# EAGLE board sw63_mk3_jig (EAGLE 9.6.2)
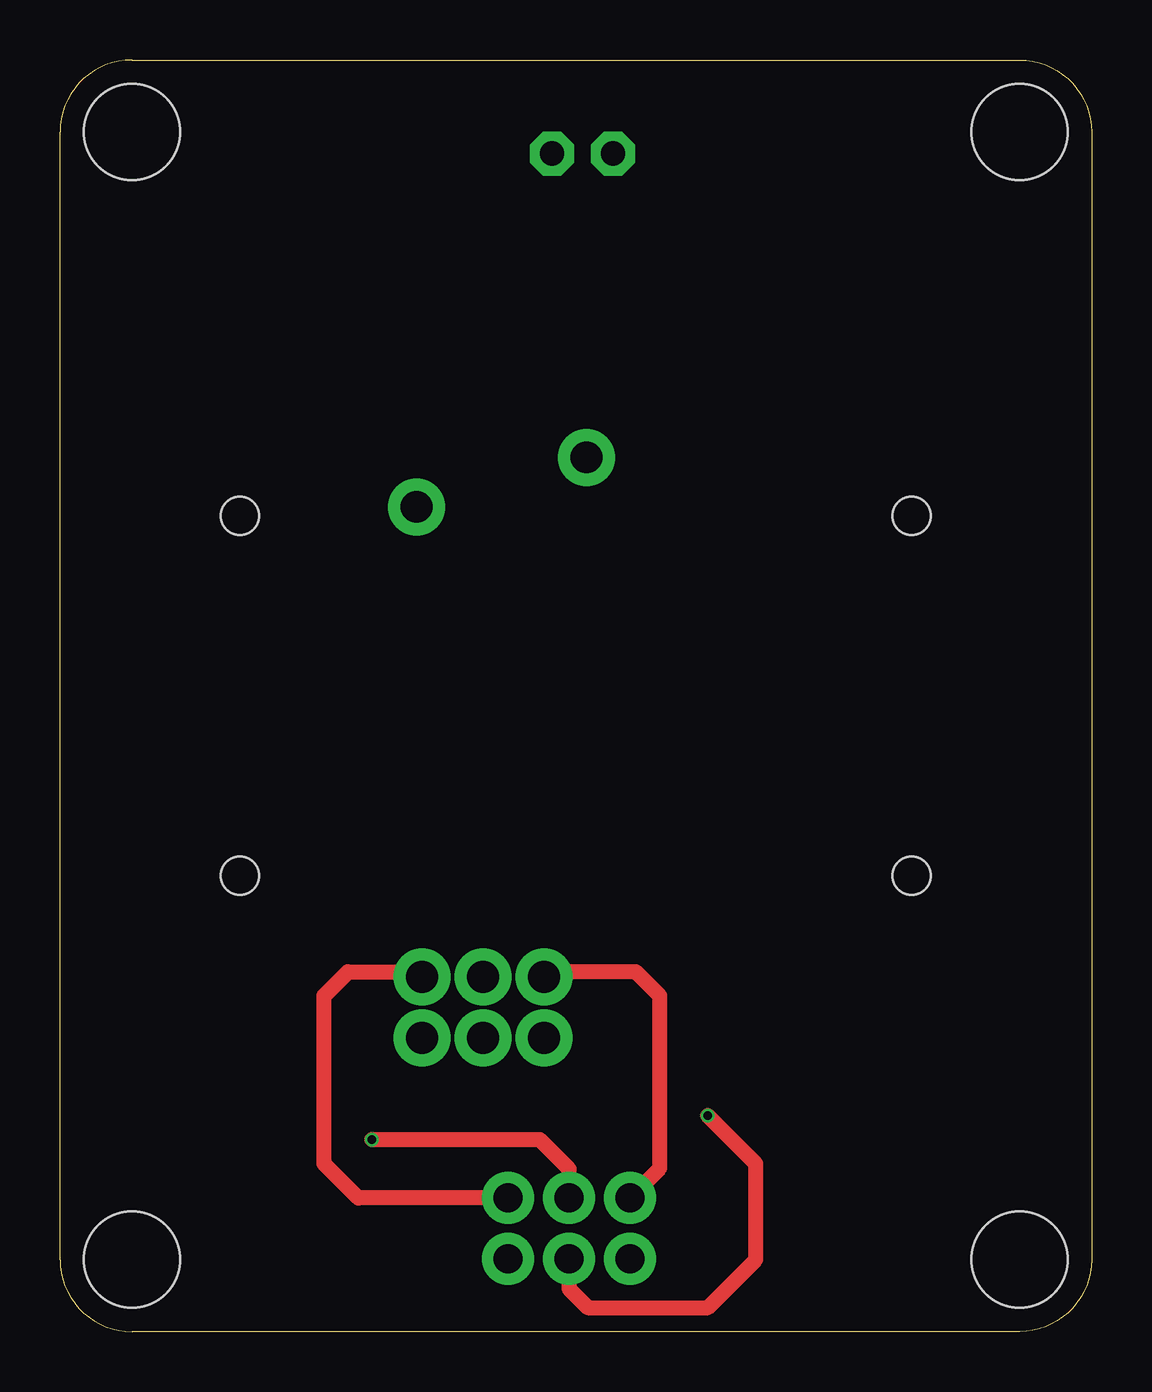
[diagram p0: board, top side]
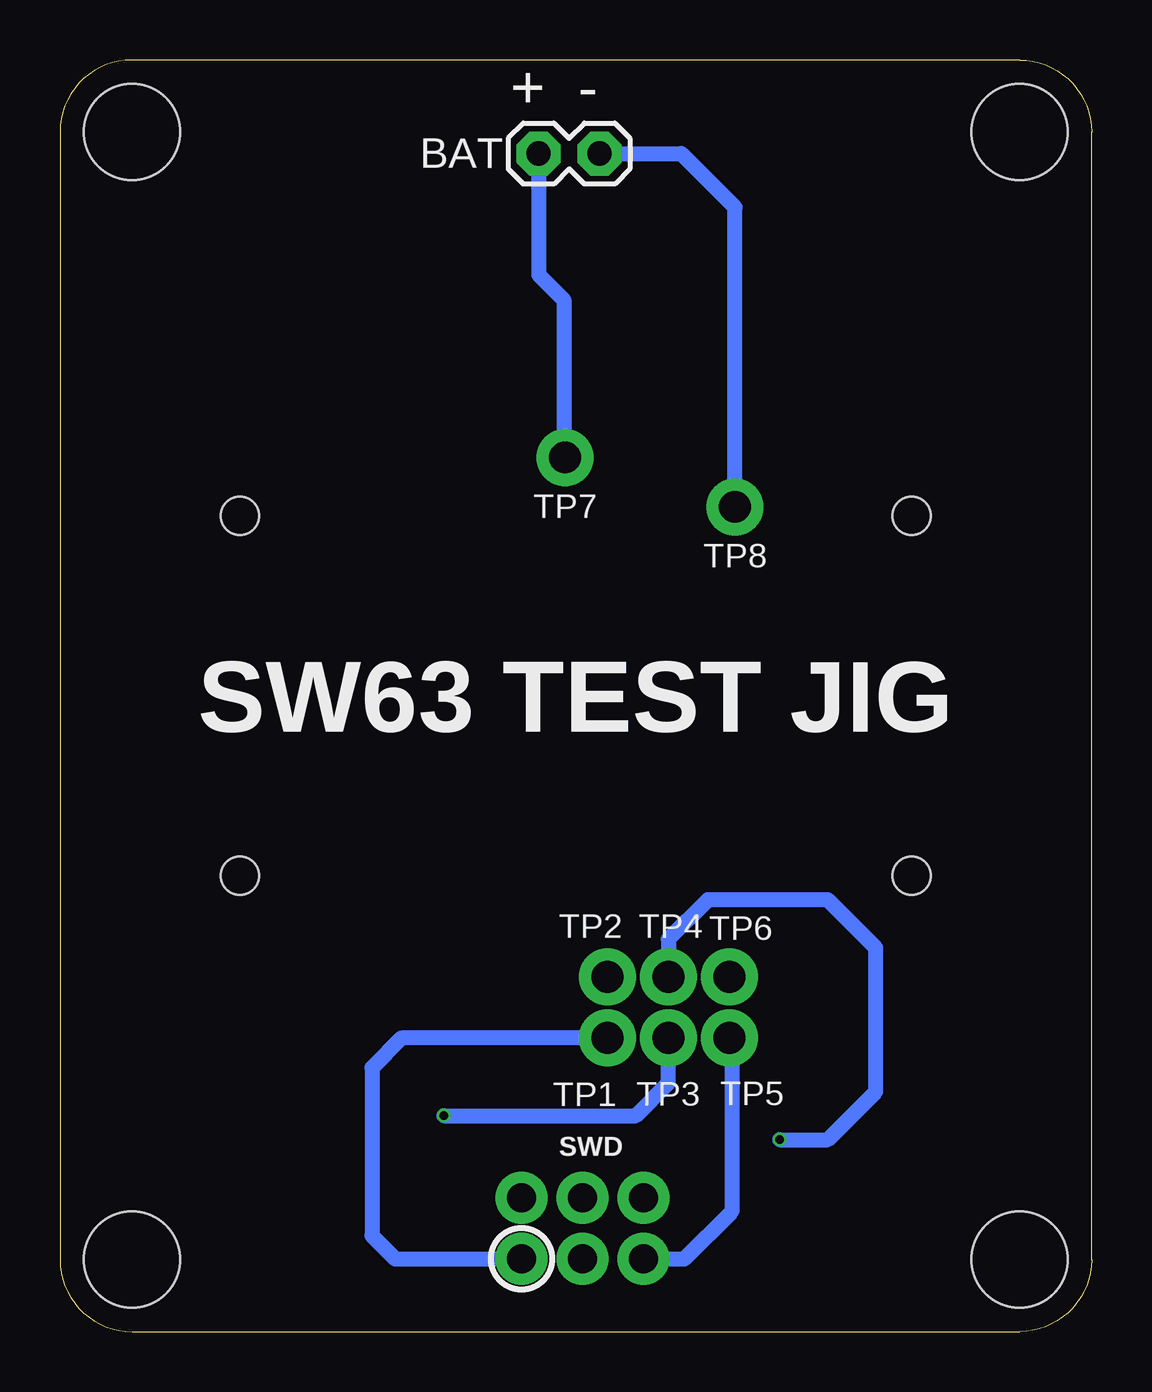
[diagram p1: board, bottom side, seen from below]

Size 43 x 53 mm. Coordinates in mm from the lower left corner, seen from the top.
Outline: 40,0 3,0 arc-90 0,3 0,50 arc-90 3,53 40,53 arc-90 43,50 43,3 arc-90 40,0
Copper layers (1*16): Top 0.035mm / dielectric 1.6mm / Bottom 0.035mm
Design rules "jlcpcb-2layers *": minimum track width 5mil, minimum drill 0.3mm, track to track 5mil, track to pad 5mil, pad to pad 5mil, via to via 5mil, smd to smd 5mil, copper to edge 0.2mm, drill to drill 6mil, minimum pad ring 10mil, minimum via ring 4mil, stop-mask expansion 4mil, vias tented up to drill 15mil, thermal gap 10mil
Holes 1.6 mm at 7.5,19 7.5,34 35.5,19 35.5,34
Holes 4 mm at 3,50 40,50 40,3 3,3

## Footprints (pad centres in the part's own frame; a part is rotated, then mirrored left to right if it is on the bottom)
1X02 = drill 1.016 octagon: 1 0,0; 2 2.54,0
2X3_POGO_ROUND = drill 1.2: P$1 0,0; P$2 0,2.54; P$3 2.54,0; P$4 2.54,2.54; P$5 5.08,0; P$6 5.08,2.54
R-075 = drill 1.32: P$1 0,0

## Placement (x,y rotation side)
BAT  M02PTH  [1X02]  23.05,49.1 0 bottom
SWD  [2X3_POGO_ROUND]  23.76,3.03 0 bottom
TP1  R-075-SC  [R-075]  20.18,12.24 0 bottom
TP2  R-075-SC  [R-075]  20.18,14.78 0 bottom
TP3  R-075-SC  [R-075]  17.64,12.24 0 bottom
TP4  R-075-SC  [R-075]  17.64,14.78 0 bottom
TP5  R-075-SC  [R-075]  15.1,12.24 0 bottom
TP6  R-075-SC  [R-075]  15.1,14.78 0 bottom
TP7  R-075-SC  [R-075]  21.95,36.43 0 bottom
TP8  R-075-SC  [R-075]  14.86,34.37 0 bottom

## Library data of the parts
BAT = BASTL_PINHEADERS; ASSEMBLED: yes; TYPE: THT
SWD = BASTL_PINHEADERS
TP1-TP8 = BASTL_TESTJIG

## Nets
BAT+: BAT.1 TP7.P$1
BAT-: BAT.2 TP8.P$1
N$6: SWD.P$1 TP1.P$1
N$14: SWD.P$3 TP3.P$1
N$35: SWD.P$5 TP5.P$1
N$36: SWD.P$6 TP6.P$1
N$37: SWD.P$4 TP4.P$1
N$38: SWD.P$2 TP2.P$1

## Tracks (layer width: path | path; a pad name or v marks a point on that pad's centre or on a via)
BAT+
  Bottom 0.635: BAT.1 23.05,44.05 22,43 22,36.48 TP7.P$1
BAT-
  Bottom 0.635: TP8.P$1 14.86,46.86 17.1,49.1 BAT.2
N$6
  Bottom 0.635: TP1.P$1 28.76,12.24 30,11 30,4 29.03,3.03 SWD.P$1
N$14  (via drill 0.35)
  Top 0.635: SWD.P$3 21.22,1.78 22,1 27,1 29,3 29,7 v27,9
  Bottom 0.635: v27,9 19,9 17.64,10.36 TP3.P$1
N$35
  Bottom 0.635: SWD.P$5 16.97,3.03 15,5 15,12.14 TP5.P$1
N$36
  Top 0.635: SWD.P$6 12.43,5.57 11,7 11,14 12,15 14.87,15 TP6.P$1
N$37  (via drill 0.35)
  Top 0.635: SWD.P$4 21.22,6.78 20,8 v13,8
  Bottom 0.635: v13,8 11,8 9,10 9,16 11,18 16,18 17.64,16.36 TP4.P$1
N$38
  Top 0.635: SWD.P$2 25,6.8 25,14 24,15 20.4,15 TP2.P$1

## Text on the board
bPlace: + - | SW63 TEST JIG